# Altium PCB CTR-Controller-Rev-A.PcbDoc (part 2 of 2)
Units mil, origin at the board's own origin, x right, y up, seen from the top; angles counter-clockwise.
Board outline 3956.69 x 4568.8 mil, 2 copper layers (Top Layer, Bottom Layer), stack 61.2 mil thick; 177 components, 110 nets, 500 pads, 208 vias.
Unrouted connection lines stored in the file: 115.
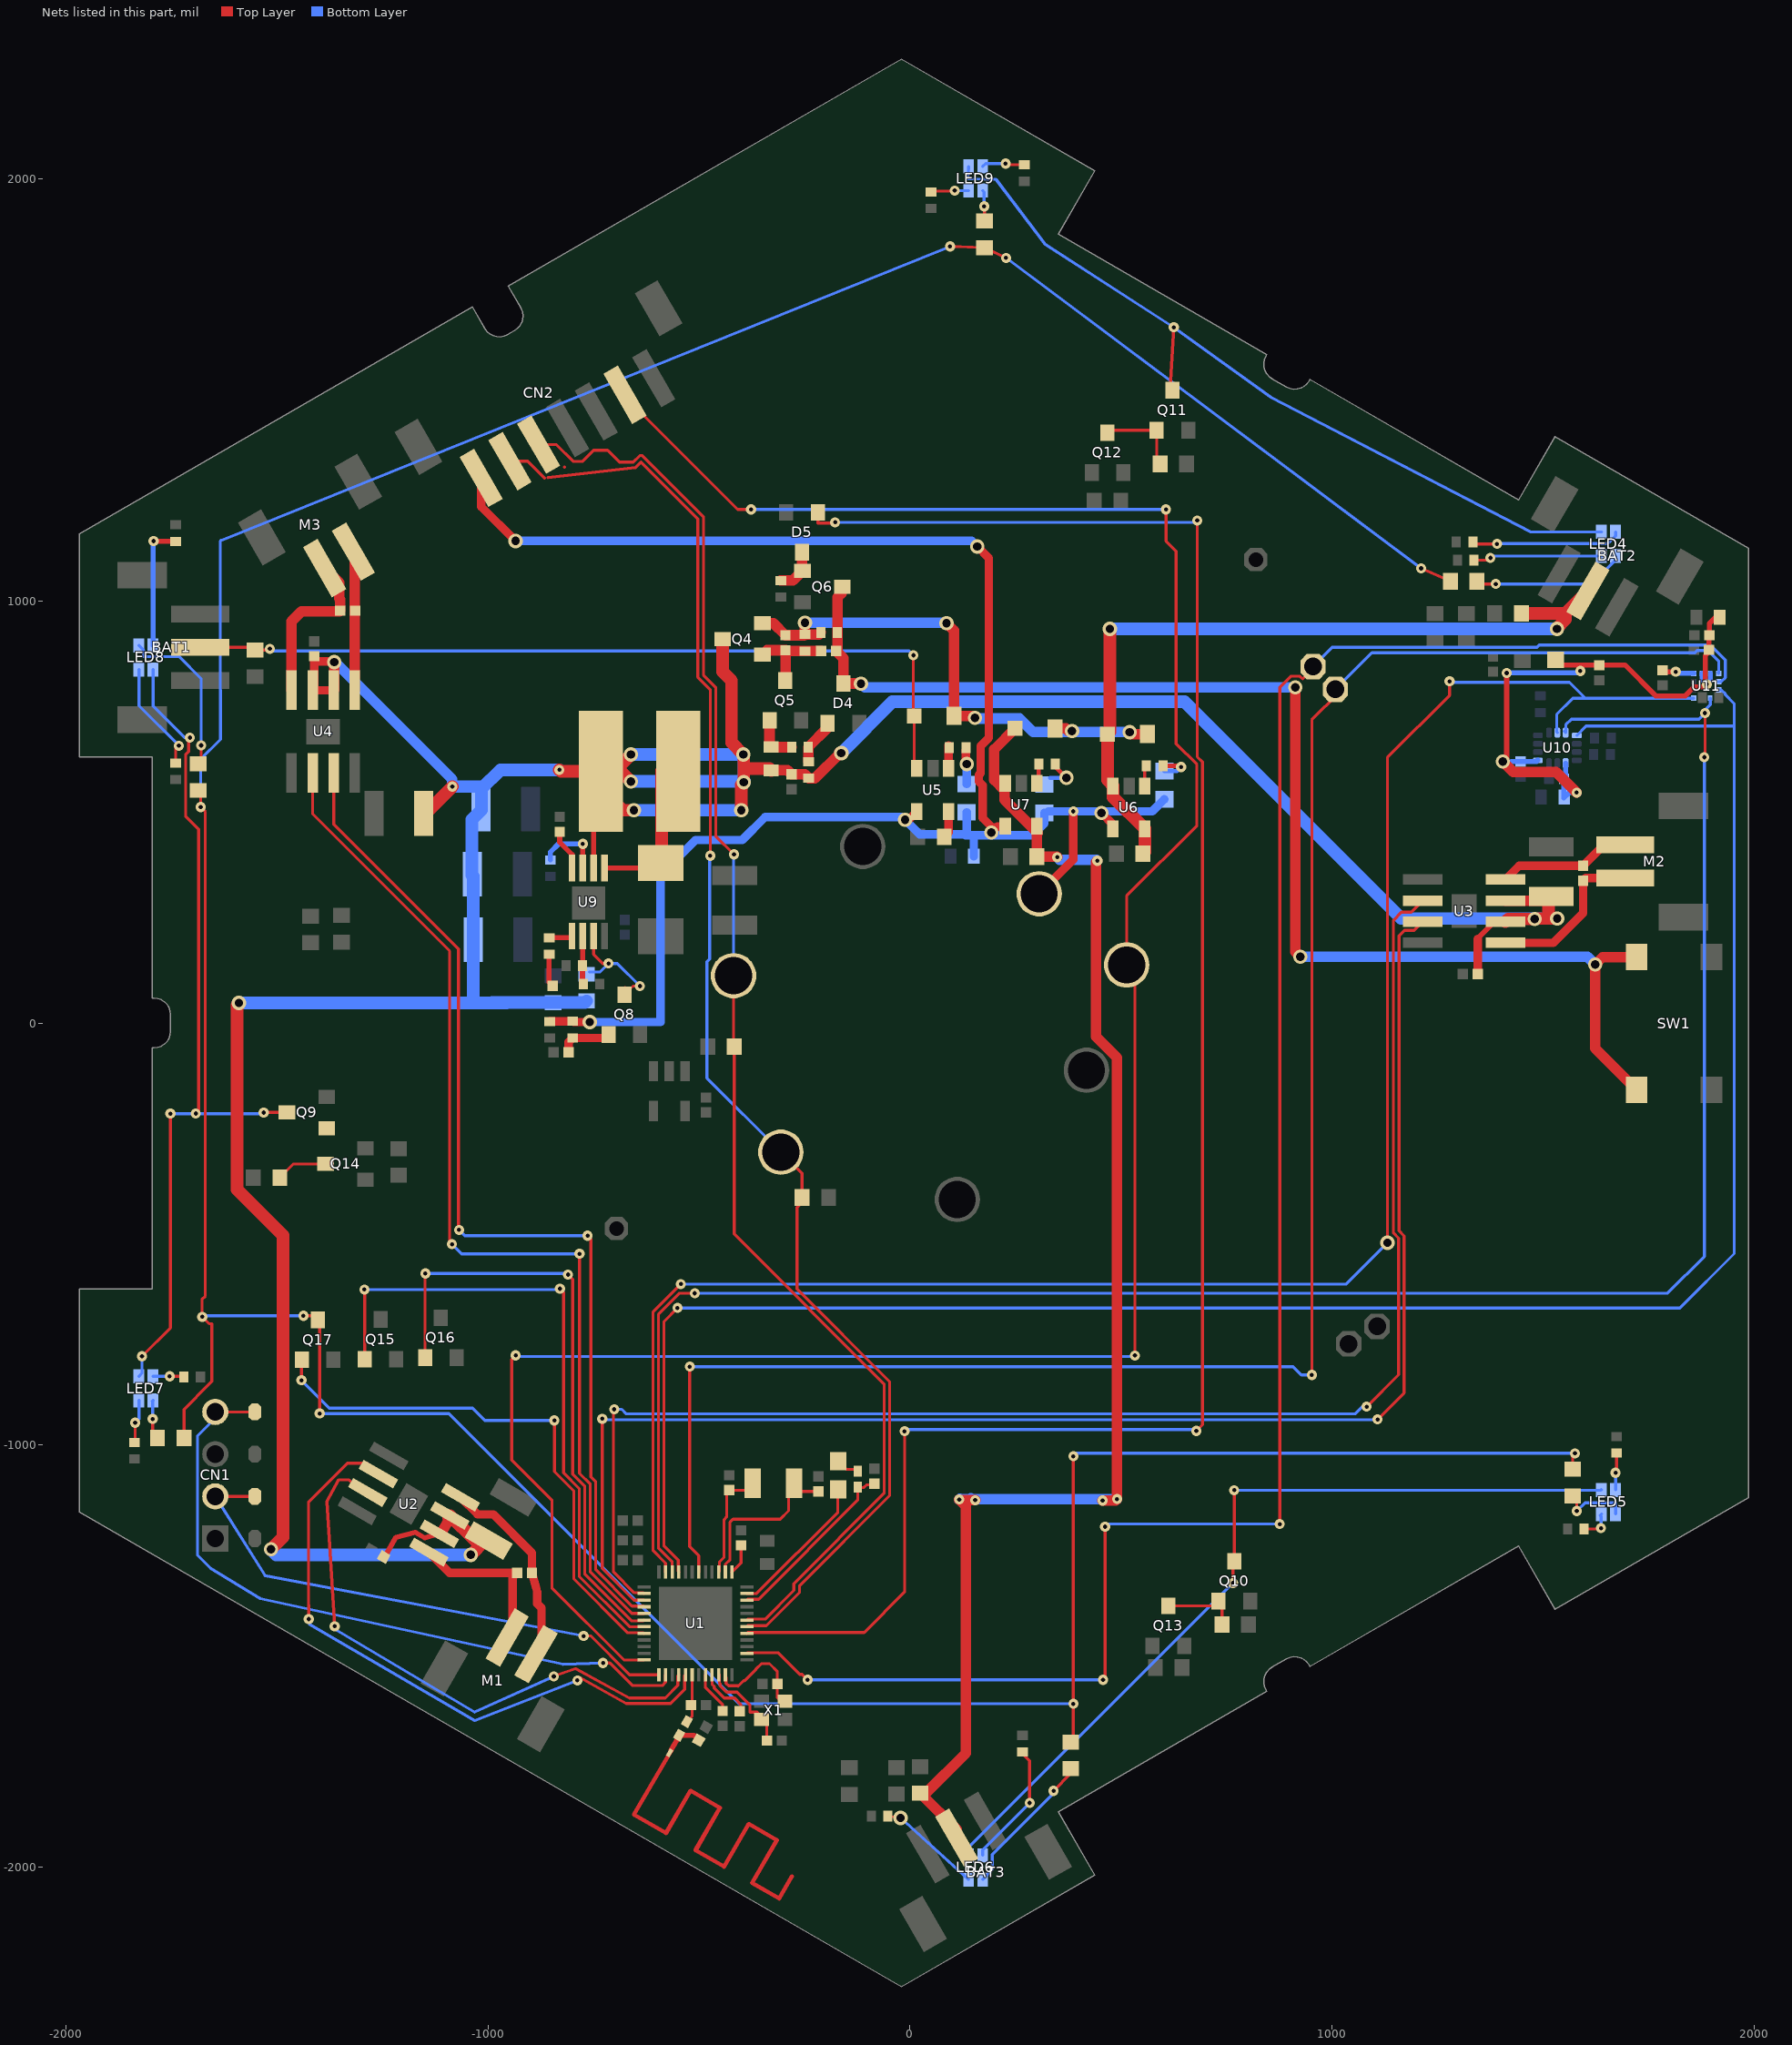
[diagram p2: the nets of this part, all layers, seen from the top]

## Via types
v1: diameter 24, hole 10, Top Layer to Bottom Layer, 168 vias
v2: diameter 34, hole 20, Top Layer to Bottom Layer, 35 vias
v3: diameter 24, hole 10, Top Layer to Bottom Layer, tented bottom, 5 vias

## Nets (pads, with @x,y where several pads share a name; then routed paths per layer and width w, separated by ;. In a path a pad name is that pad's centre, name@x,y a point inside that pad or via, vN(x,y) a via of type N, cw(c..) or ccw(c..) an arc to the next point about the centre after c; other vN are vias at no path point) (continued)
LED_PWM_BLUE: Q16.1 U1.18 | length 1452.7
  Top Layer w7: Q16.1@-1149.61,-793.31 -1149.61,-594.49 v1(-1148.82,-593.7) ; v1(-810.63,-596.46) -799.76,-607.33 -799.76,-1069.85 -770.95,-1098.67 -770.95,-1306.84 -660.68,-1417.1 -632.46,-1417.1 U1.18@-630.71,-1415.35
  Bottom Layer w7: v1(-1148.82,-593.7) -813.39,-593.7 v1(-810.63,-596.46)
LED_PWM_GREEN: Q15.1 U1.19 | length 1533.7
  Top Layer w7: v1(-1293.31,-631.89) -1292.52,-632.68 Q15.1@-1292.52,-797.24 ; v1(-829.92,-629.92) -821.41,-638.43 -821.41,-1066.58 -783.95,-1104.05 -783.95,-1312.22 -665.07,-1431.1 U1.19@-630.71,-1431.1
  Bottom Layer w7: v1(-1293.31,-631.89) -831.89,-631.89 v1(-829.92,-629.92)
LED_PWM_RED: Q17.1 U1.20 | length 1303.9
  Top Layer w7: v1(-1442.52,-846.85) -1442.52,-803.54 -1444.49,-801.57 Q17.1@-1441.34,-798.43 ; v1(-842.91,-942.13) -842.91,-1063.47 -796.95,-1109.44 -796.95,-1317.61 -669.05,-1445.5 -632.06,-1445.5 U1.20@-630.71,-1446.85
  Bottom Layer w7: v1(-1442.52,-846.85) -1376.55,-912.82 -1037.01,-912.82 -1007.7,-942.13 v1(-842.91,-942.13)
M1_PWMA: U1.29 U2.2 | length 1542.4
  Top Layer w7: v1(-1425.2,-1412.99) -1425.65,-1343.47 -1425.65,-1135.49 -1333.46,-1043.31 -1286.73,-1043.31 U2.2@-1260.36,-1069.68 ; v1(-788.58,-1558.27) -783.46,-1550.79 -672.66,-1613.02 -567.37,-1613.02 -534.03,-1579.68 -534.03,-1547.02 U1.29@-532.28,-1545.28
  Bottom Layer w7: v1(-1425.2,-1412.99) -1422.89,-1425.65 -1031.89,-1653.57 v1(-788.58,-1558.27)
M1_PWMB: U1.28 U2.3 | length 1387.9
  Top Layer w7: v1(-1363.78,-1429.92) -1382.28,-1134.65 -1354.84,-1083.07 -1329.53,-1083.07 -1299.61,-1112.99 U2.3@-1285.36,-1112.99 ; v1(-844.49,-1548.82) -843.31,-1547.64 -792.91,-1530.31 -665.55,-1600.02 -580.13,-1600.02 -550.34,-1570.23 -550.34,-1547.59 U1.28@-548.03,-1545.28
  Bottom Layer w7: v1@-1368.7,-1432.61 -1367.62,-1434.6 -1366.83,-1435.07 -1031.81,-1633.54 v1(-844.49,-1548.82)
M2_PWMA: U1.14 U3.2 | length 3552.8
  Top Layer w7: v1(-701.18,-915.75) -703.02,-917.59 -703.02,-1301.22 -653.63,-1350.61 -632.46,-1350.61 U1.14@-630.71,-1352.36 ; v1(1082.28,-909.45) 1157.95,-833.79 1157.95,-510.23 1145.89,-498.17 1145.89,243.4 1164.95,262.46 1187.89,262.46 U3.2@1215.39,289.96
  Bottom Layer w7: v1(-701.18,-915.75) -683.46,-915.75 -672.59,-926.63 1054.87,-926.63 1072.05,-909.45 v1(1082.28,-909.45)
M2_PWMB: U1.15 U3.3 | length 3571.3
  Top Layer w7: v1(-729.53,-938.19) -729.53,-1293.1 -654.52,-1368.11 U1.15@-630.71,-1368.11 ; v1(1108.27,-939.76) 1170.95,-877.09 1170.95,-504.85 1158.89,-492.79 1158.89,206.4 1172.18,219.69 1195.11,219.69 U3.3@1215.39,239.96
  Bottom Layer w7: v1(-729.53,-938.19) -727.32,-940.4 1107.63,-940.4 v1(1108.27,-939.76)
M3_PWMA: U1.17 U4.2 | length 2498.2
  Top Layer w7: U4.2@-1415.94,592.55 -1415.94,495.08 -1091.4,170.53 -1091.4,-518.84 v1(-1085.83,-524.41) ; v1(-783.46,-547.24) -783.46,-1067.76 -757.95,-1093.28 -757.95,-1301.45 -659.79,-1399.61 U1.17@-630.71,-1399.61
  Bottom Layer w7: v1(-1085.83,-524.41) -1062.99,-547.24 v1(-783.46,-547.24)
M3_PWMB: U1.16 U4.3 | length 2466.9
  Top Layer w7: U4.3@-1365.94,592.55 -1365.94,471.06 -1070.47,175.59 -1070.47,-488.98 v1(-1068.9,-490.55) ; v1(-764.17,-504.33) -756.69,-511.81 -756.69,-1076.15 -744.95,-1087.9 -744.95,-1296.07 -658.97,-1382.05 -640.29,-1382.05 -640.29,-1382.11 -632.46,-1382.11 U1.16@-630.71,-1383.86
  Bottom Layer w7: v1(-1068.9,-490.55) -1055.12,-504.33 v1(-764.17,-504.33)
MAG_DRDY: TP6.1 U1.38 U11.8 | length 4821
  Top Layer w7: U1.38@-386.61,-1494.09 -385.18,-1492.66 -312.83,-1492.66 -261.38,-1544.1 -255.9,-1544.1 v1(-242.91,-1557.09) ; v1(457.48,-1557.09) 462.2,-1552.36 v1(462.2,-1194.09) ; v1(876.38,-1187.8) 876.38,795.74 902.41,821.78 924.36,821.78 930.75,815.39 957.87,842.52 TP6.1@955.51,844.88
  Bottom Layer w7: v1(-242.91,-1557.09) v1(457.48,-1557.09) ; v1(462.2,-1194.09) 468.5,-1187.8 v1(876.38,-1187.8) ; TP6.1@955.12,844.88 1000.78,890.54 1485.7,890.54 1491.1,895.94 1896.78,895.94 1932.43,860.29 1932.43,818.41 1923.08,809.06 U11.8@1916.54,809.06
MAG_INT: TP7.1 U1.6 U11.7 | length 4620.8
  Top Layer w7: v1(-522.29,-814.72) -522.29,-1241.35 -500.85,-1262.78 -500.85,-1301.12 U1.6@-500.79,-1301.18 ; v1(952.36,-834.25) 952.36,718.5 1016.54,782.68 TP7.1@1008.27,790.94
  Bottom Layer w7: v1(-522.29,-814.72) 908.03,-814.72 927.56,-834.25 v1(952.36,-834.25) ; TP7.1@1008.27,790.94 1094.87,877.54 1860.33,877.54 1865.73,882.94 1891.39,882.94 1916.99,857.35 1916.99,832.34 1914.96,830.32 U11.7@1916.54,828.74
MISO: U1.9 U10.1 U11.9 | length 4948.9
  Top Layer w7: v1(-551.18,-675.59) -583.16,-707.57 -583.16,-1239.87 -549.65,-1273.38 -549.65,-1299.56 U1.9@-548.03,-1301.18
  Bottom Layer w7: v1(-551.18,-675.59) 1824.8,-675.59 1953.54,-546.85 1953.54,757.09 1932.43,778.2 1932.43,780.02 1923.08,789.37 U11.9@1916.54,789.37 ; U10.1@1580.32,681.5 1602.52,703.7 1951.73,703.7 1952.76,704.72
MOSI: U1.10 U10.14 U11.11 | length 4853.9
  Top Layer w7: U1.10@-563.78,-1301.18 -563.78,-1277.64 -596.16,-1245.26 -596.16,-690.17 -546.55,-640.55 v1(-510.24,-640.55) ; v1(1882.68,629.92) 1884.25,631.5 v1(1884.25,734.65)
  Bottom Layer w7: v1(-510.24,-640.55) 1795.67,-640.55 1882.68,-553.54 v1(1882.68,629.92) ; U10.14@1550.54,691.58 U10.14@1553.94,688.19 1554.33,688.58 1554.33,706.69 1567.72,720.08 1869.68,720.08 v1(1884.25,734.65) 1884.25,741.73 1896.85,754.33 U11.11@1896.85,769.68
NetC1_1: C1.1 L1.2 U1.46 | length 431.6
  Top Layer w7: U1.46@-386.61,-1368.11 -384.3,-1365.8 -358.78,-1365.8 -124.02,-1131.03 L1.2@-124.02,-1100.2 ; L1.2@-121.36,-1102.85 -119.49,-1100.98 -109.45,-1100.98 -103.35,-1094.88 C1.1@-84.65,-1094.88
NetC2_1: C2.1 U1.35 X1.3 | length 247.1
  Top Layer w7: U1.35@-437.8,-1545.28 -437.8,-1549.33 -435.98,-1551.14 -435.98,-1565.17 -430.13,-1571.02 -408.75,-1571.02 -407.56,-1572.21 -394.62,-1559.28 -392.26,-1559.28 -364.81,-1531.82 -364.81,-1531.25 -352.21,-1518.66 -333.09,-1518.66 -314.57,-1537.18 C2.1@-314.57,-1566.54 -314.57,-1599.61 X1.3@-307.87,-1606.3
NetC3_1: C3.1 U1.34 X1.1 | length 227.9
  Top Layer w7: U1.34@-453.54,-1545.28 -451.8,-1545.28 -451.8,-1556.97 -451.73,-1556.97 -451.73,-1565.17 -449.98,-1566.91 -449.98,-1570.96 -434.74,-1586.21 -410.24,-1586.21 -379.29,-1617.17 -379.29,-1633.62 -362.83,-1633.62 -351.57,-1644.88 X1.1@-351.57,-1651.18 -339.37,-1663.39 C3.1@-339.37,-1700.79
NetC5_1: C5.1 U1.1 | length 72
  Top Layer w7: U1.1@-422.05,-1301.18 -400.39,-1279.53 C5.1@-400.39,-1238.19
NetC6_1: C6.1 U1.33 | length 127.2
  Top Layer w7: U1.33@-469.29,-1545.28 -469.29,-1567.47 -465.8,-1570.97 -465.73,-1570.97 -463.98,-1572.71 -463.98,-1576.76 -440.54,-1600.21 -416.04,-1600.21 -401.18,-1615.07 C6.1@-401.18,-1629.92
NetC7_1: C7.1 U1.32 | length 102.4
  Top Layer w7: U1.32@-485.04,-1545.28 -485.04,-1575.51 -444.09,-1616.45 C7.1@-444.09,-1630.71
NetC8_2: C8.2 U1.2 X2.1 | length 402.8
  Top Layer w7: U1.2@-437.8,-1301.18 -437.8,-1283.1 -426.77,-1272.08 -426.77,-1183.07 -419.69,-1175.98 -307.48,-1175.98 -287.8,-1156.3 X2.1@-287.8,-1091.73 ; X2.1@-274.8,-1090.94 -255.51,-1110.24 C8.2@-217.32,-1110.24
NetC9_2: C9.2 U1.3 X2.2 | length 265.5
  Top Layer w7: U1.3@-453.54,-1301.18 -451.8,-1299.43 -451.8,-1277.3 -440.77,-1266.28 -440.77,-1177.27 -434.65,-1171.15 C9.2@-434.65,-1114.96 ; C9.2@-421.65,-1114.17 C9.2@-428.35,-1107.48 -389.76,-1107.48 X2.2@-373.23,-1090.94
NetC10_1: C10.1 L3.1 U1.30 | length 120.5
  Top Layer w7: L3.1@-528.84,-1655.85 -516.54,-1643.55 U1.30@-516.54,-1545.28 ; C10.1@-525.76,-1618.2 C10.1@-522.37,-1621.58
NetC11_1: C11.1 E1.1 L3.2 | length 81.3
  Top Layer w12: E1.1@-566.88,-1725.01 L3.2@-551.93,-1699.11 ; L3.2@-547.54,-1688.24 -512.73,-1688.24 C11.1@-500.98,-1699.99
NetC17_1: C17.1 M1.2 U2.5 | length 362.1
  Top Layer w20: U2.5@-1140.61,-1254.29 -1091.36,-1303.54 C17.1@-931.5,-1303.54 -941.81,-1313.86 M1.2@-941.81,-1431.89
NetC17_2: C17.2 M1.1 U2.8 | length 444.8
  Top Layer w20: U2.8@-1065.61,-1124.38 -1025.35,-1164.65 -987.97,-1164.65 -896.06,-1256.56 C17.2@-896.06,-1303.54 -886.62,-1338.19 -883.72,-1348.82 -883.72,-1376.17 -873.62,-1386.27 M1.1@-873.62,-1471.26
NetC20_1: C20.1 M2.2 U3.5 | length 392.1
  Top Layer w20: U3.5@1411.39,189.96 1524.61,189.96 1595.28,260.63 C20.1@1595.28,337.01 1601.57,343.31 M2.2@1695.28,343.31
NetC20_2: C20.2 M2.1 U3.8 | length 317.9
  Top Layer w20: U3.8@1411.39,339.96 1443.87,372.44 C20.2@1595.28,372.44 1644.88,422.05 M2.1@1695.28,422.05
NetC23_1: C23.1 M3.2 U4.5 | length 330.5
  Top Layer w25: M3.2@-1319.29,1117.32 -1316.14,1114.17 -1316.14,912.8 -1316.6,912.34 -1316.6,789.21 U4.5@-1315.94,788.55
NetC23_2: C23.2 M3.1 U4.8 | length 405.1
  Top Layer w25: U4.8@-1465.95,788.55 -1465.94,952.17 -1442.52,975.59 -1352.36,975.59 C23.2@-1350.79,977.17 -1350.79,1003.94 -1353.15,1006.3 -1353.15,1043.62 M3.1@-1387.48,1077.95
NetC28_2: C28.2 C32.2 Q4.1 Q5.3 R17.1 | length 216
  Top Layer w25: Q4.1@-349.61,872.83 -338.98,883.46 C28.2@-295.28,883.46 ; Q5.3@-295.67,811.81 -295.28,812.2 C28.2@-295.28,883.46 ; C32.2@-210.63,881.5 R17.1@-249.21,881.5 -293.31,881.5 C28.2@-295.28,883.46
NetC29_2: C29.2 Q5.1 R20.2 | length 113.6
  Top Layer w25: Q5.1@-333.07,717.32 -333.07,657.87 C29.2@-329.13,653.94 -328.74,653.54 R20.2@-280.71,653.54
NetC32_1: C32.1 D4.3 Q6.3 R16.1 SW1.3 SW1.4 | length 3096.1
  Top Layer w25: Q6.3@-162.6,1018.11 -172.05,1008.66 R16.1@-172.05,925.59 -172.05,884.65 C32.1@-175.2,881.5 -157.87,864.17 D4.3@-157.87,804.72 -116.93,804.72 v2(-116.54,804.33) ; v2(913.39,795.28) 913.39,168.5 v2(924.8,157.09) ; SW1.4@1722.44,-158.66 1624.02,-60.24 v2(1624.02,138.58) 1641.73,156.3 SW1.3@1722.44,156.3
  Bottom Layer w25: v2(-116.54,804.33) -107.48,795.28 v2(913.39,795.28) ; v2(924.8,157.09) 1605.51,157.09 v2(1624.02,138.58) v2@1622.44,138.58
NetC40_1: C40.1 U9.8 | length 97.9
  Top Layer w12: C40.1@-830.32,453.15 -830.32,428.35 -801.18,399.21 U9.8@-801.18,367.32
NetC41_1: C41.1 R26.2 | length 78
  Top Layer w12: R26.2@-855.51,162.6 -855.51,96.85 C41.1@-846.85,88.19
NetC42_1: C42.1 C43.1 C44.1 C45.1 C46.1 C47.1 C49.1 L5.1 U10.5 U10.8 U11.5 U11.6 | length 1453.4
  Top Layer w12: v2(1405.12,619.68) 1414.17,628.74 v1(1414.17,829.53) ; L5.1@1530.32,860.63 1542.52,848.43 1588.58,848.43 ; v1(1588.58,834.25) 1588.58,848.43 ; v1@1884.65,810.63 1884.65,870.04 1893.31,878.7 C49.1@1893.31,884.65 1893.31,917.72 C45.1@1894.49,918.9 1894.49,946.46 C46.1@1914.17,966.14 ; v1(1888.58,802.75) 1887.01,802.75 1881.1,796.85 1858.98,796.85 1837.13,775 1767.87,775 1694.45,848.43 1588.58,848.43
  Top Layer w25: v2(1405.12,619.68) 1429.92,594.88 1531.1,594.88 v1(1579.92,546.06)
  Bottom Layer w7: U10.8@1487.8,622.83 U10.8@1488.19,622.44
  Bottom Layer w12: v2(1405.12,619.68) 1415.35,609.45 1425.59,619.68 C43.1@1446.85,619.68 1484.65,619.68 U10.8@1487.8,622.83 ; v1(1414.17,829.53) 1583.86,829.53 v1(1588.58,834.25) ; C42.1@1550,578.35 1550,533.46 1562.6,546.06 v1(1579.92,546.06) ; C42.1@1553.94,577.95 U10.5@1553.94,615.75 ; U11.5@1877.17,828.74 1877.17,814.17 v1(1888.58,802.75) 1896.85,811.03 U11.6@1896.85,828.74
NetC50_1: C50.1 U11.4 | length 76.6
  Top Layer w12: C50.1@1783.86,835.83 1787.4,832.28 v1(1814.96,832.28)
  Bottom Layer w12: v1(1814.96,832.28) 1818.5,828.74 U11.4@1857.48,828.74
NetD4_1: D4.1 R18.1 R20.1 | length 109
  Top Layer w25: R18.1@-241.24,620.37 -241.34,620.47 R20.1@-241.34,653.54 -195.28,699.61 D4.1@-195.28,710.24
NetD5_3: D5.3 Q6.1 R21.2 | length 105.1
  Top Layer w25: R21.2@-306.3,1048.82 -277.95,1048.82 Q6.1@-255.12,1071.65 -255.91,1072.44 D5.3@-255.91,1115.75
NetD6_1: D6.1 L4.2 U9.5 | length 349
  Top Layer w12: U9.5@-724,367.32 D6.1@-616.14,367.32
  Top Layer w20: D6.1@-616.14,367.32 D6.1@-607.09,376.38
  Top Layer w30: D6.1@-607.09,376.38 -588.98,394.49 L4.2@-588.98,597.24
NetL1_1: L1.1 L2.2 | length 59.8
  Top Layer w7: L2.2@-170.08,-1038.58 -150.79,-1057.87 L1.1@-118.31,-1057.87
NetL2_1: L2.1 U1.47 | length 327.8
  Top Layer w7: U1.47@-386.61,-1352.36 -363.73,-1352.36 -171.26,-1159.89 -171.26,-1127.17
NetLED1_2: LED1.2 R2.2 | length 81.5
  Top Layer w20: R2.2@132.28,646.85 132.28,615.75 v2(134.25,613.78)
  Bottom Layer w20: LED1.2@134.25,566.14 v2(134.25,613.78)
NetLED2_2: LED2.2 R6.2 | length 87.7
  Top Layer w10: R6.2@599.61,609.45 639.76,609.45 v1(642.52,606.69)
  Bottom Layer w10: LED2.2@602.76,597.24 633.07,597.24 v1(642.52,606.69)
NetLED3_2: LED3.2 R12.2 | length 81.6
  Top Layer w10: R12.2@344.49,613.39 344.49,607.09 v2(370.47,581.1)
  Bottom Layer w10: LED3.2@331.89,581.1 v2(370.47,581.1)
NetLED4_1: LED4.1 R47.2 | length 364.2
  Top Layer w7: R47.2@1343.7,1046.85 1350,1040.55 v1(1388.19,1040.55)
  Bottom Layer w7: v1(1388.19,1040.55) 1615.62,1040.55 1672.35,1097.28 LED4.1@1672.35,1106.78
NetLED4_2: LED4.2 R44.2 | length 357.4
  Top Layer w7: R44.2@1334.25,1140.16 1338.98,1135.43 v1(1391.34,1135.43)
  Bottom Layer w7: v1(1391.34,1135.43) 1392.13,1136.22 1654.2,1136.22 1672.35,1154.37 LED4.2@1672.35,1163.87
NetLED4_3: LED4.3 R41.2 | length 306.4
  Top Layer w7: R41.2@1336.61,1096.85 1370.08,1096.85 v1(1375.59,1102.36)
  Bottom Layer w7: v1(1375.59,1102.36) 1380.01,1106.78 LED4.3@1638.88,1106.78
NetLED4_4: LED4.4 LED9.4 Q11.3 | length 1948.1
  Top Layer w7: Q11.3@622.05,1499.61 616.54,1505.12 v1(625.2,1648.82)
  Bottom Layer w7: LED9.4@138.68,2030.01 137.4,2000.79 203.94,1999.21 320.39,1845.53 v1(625.2,1648.82) 855.12,1483.07 1471.26,1163.87 LED4.4@1638.88,1163.87
NetLED5_1: LED5.1 R46.2 | length 166.8
  Top Layer w7: R46.2@1570.47,-1120.87 1580.32,-1130.71 v1(1580.32,-1156.69)
  Bottom Layer w7: v1(1580.32,-1156.69) 1599.87,-1137.13 1672.35,-1137.13 LED5.1@1672.35,-1163.87
NetLED5_2: LED5.2 R43.2 | length 88.1
  Top Layer w7: v1(1672.35,-1066.24) 1674.8,-1063.78 R43.2@1674.8,-1019.69
  Bottom Layer w7: LED5.2@1672.35,-1106.78 v1(1672.35,-1066.24)
NetLED5_3: LED5.3 R40.2 | length 76.8
  Top Layer w7: R40.2@1598.03,-1199.61 1635.83,-1199.61 v1(1637.8,-1197.64)
  Bottom Layer w7: v1(1637.8,-1197.64) 1637.8,-1169.68 1635.43,-1167.31 LED5.3@1638.88,-1163.87
NetLED5_4: LED5.4 LED6.4 Q10.3 | length 1997.4
  Top Layer w7: v1(765.35,-1327.56) 765.35,-1279.13 Q10.3@768.5,-1275.98 v1(768.5,-1107.48)
  Bottom Layer w7: LED6.4@138.68,-1972.92 138.68,-1954.23 v1(765.35,-1327.56) ; v1(768.5,-1107.48) 1637.22,-1107.48 1638.4,-1106.3 LED5.4@1638.88,-1106.78
NetLED6_1: LED6.1 R55.2 | length 348.7
  Top Layer w7: v1(340.08,-1820.16) 380.71,-1779.53 R55.2@380.71,-1767.72
  Bottom Layer w7: LED6.1@172.14,-2030.01 194.94,-2007.21 194.94,-1971.04 340.08,-1825.9 v1(340.08,-1820.16)
NetLED6_2: LED6.2 R52.2 | length 299.9
  Top Layer w7: R52.2@266.93,-1727.95 264.57,-1730.32 283.46,-1749.21 v1(283.46,-1848.82)
  Bottom Layer w7: LED6.2@172.14,-1972.92 172.14,-1960.14 v1(283.46,-1848.82)
NetLED6_3: LED6.3 R49.2 | length 247.5
  Top Layer w7: R49.2@-52.36,-1879.92 v2(-22.44,-1884.25)
  Bottom Layer w7: v2(-22.44,-1884.25) LED6.3@138.68,-2030.01
NetLED7_1: LED7.1 R54.2 | length 92.5
  Top Layer w7: R54.2@-1796.06,-985.83 -1795.28,-985.04 v1(-1795.28,-938.58)
  Bottom Layer w7: v1(-1795.28,-938.58) -1795.28,-897.24 -1796.06,-896.46 LED7.1@-1794.29,-894.69
NetLED7_2: LED7.2 R51.2 | length 73.8
  Top Layer w7: v1(-1754.92,-837.6) -1723.03,-837.6 R51.2@-1721.26,-839.37
  Bottom Layer w7: LED7.2@-1794.29,-837.6 v1(-1754.92,-837.6)
NetLED7_3: LED7.3 R48.2 | length 103.7
  Top Layer w7: R48.2@-1838.19,-994.09 -1836.61,-992.52 v1(-1836.61,-947.64)
  Bottom Layer w7: v1(-1836.61,-947.64) -1827.76,-938.78 LED7.3@-1827.76,-894.69
NetLED7_4: LED7.4 LED8.4 Q9.3 | length 2035.1
  Top Layer w7: v1(-1820.47,-790.16) -1753.15,-722.83 v1(-1753.15,-214.96) ; v1@-1710.07,666.61 -1710.07,643.05 -1717.09,636.03 -1717.09,489.92 -1686.22,459.06 -1686.22,-207.87 v1(-1692.91,-214.57) ; v1(-1531.89,-212.6) -1531.5,-212.2 Q9.3@-1477.17,-212.2
  Bottom Layer w7: LED7.4@-1827.76,-837.6 -1820.47,-830.31 v1(-1820.47,-790.16) ; LED8.4@-1794.29,837.6 -1794.29,750.83 -1719.83,676.38 v1(-1707.08,676.38) ; v1(-1753.15,-214.96) -1534.25,-214.96 v1(-1531.89,-212.6)
NetLED8_1: LED8.1 R45.2 | length 393.7
  Top Layer w7: R45.2@-1687.4,614.17 -1680.32,621.26 v1(-1680.32,657.87)
  Bottom Layer w7: LED8.1@-1827.76,894.69 -1816.59,883.52 -1816.59,868.45 -1777.56,868.45 -1777.51,868.5 -1732.68,868.5 -1680.32,816.14 v1(-1680.32,657.87)
NetLED8_2: LED8.2 R42.2 | length 266.9
  Top Layer w7: R42.2@-1740.94,616.14 -1740.94,654.33 -1738.19,657.09 v1(-1733.07,657.09)
  Bottom Layer w7: LED8.2@-1827.76,837.6 -1827.76,751.77 v1(-1733.07,657.09)
NetLED8_3: LED8.3 R39.2 | length 300.3
  Top Layer w12: v1(-1792.91,1142.13) -1741.73,1142.13 R39.2@-1740.94,1141.34
  Bottom Layer w12: LED8.3@-1794.29,894.69 -1794.29,1140.75 v1(-1792.91,1142.13)
NetLED9_1: LED9.1 R56.2 | length 73.9
  Top Layer w7: v1(175.59,1935.43) 176.38,1934.65 R56.2@176.38,1900.79
  Bottom Layer w7: LED9.1@172.14,1972.92 175.59,1969.47 v1(175.59,1935.43)
NetLED9_2: LED9.2 R53.2 | length 103.2
  Top Layer w7: v1(226.38,2037.01) 229.13,2034.25 R53.2@271.26,2034.25
  Bottom Layer w7: LED9.2@172.14,2030.01 179.14,2037.01 v1(226.38,2037.01)
NetLED9_3: LED9.3 R50.2 | length 90
  Top Layer w7: R50.2@50,1969.69 51.97,1971.65 104.72,1971.65 v1(105.99,1972.92)
  Bottom Layer w7: v1(105.99,1972.92) LED9.3@138.68,1972.92
NetQ8_3: Q8.3 R24.1 U9.3 | length 285.2
  Top Layer w7: U9.3@-750,205.91 -750,162.6 -728.35,140.94 v1(-714.57,140.94) ; Q8.3@-677.17,66.93 -656.69,87.4 v1(-640.16,87.4) ; Q8.3@-675.44,84.11 Q8.3@-674.41,83.07
  Bottom Layer w7: R24.1@-760.24,120.87 -734.65,120.87 v1(-714.57,140.94) -693.7,140.94 v1(-640.16,87.4)
NetQ9_1: Q9.1 Q14.3 R33.1 | length 121.6
  Top Layer w7: R33.1@-1493.7,-366.54 -1461.42,-334.25 Q14.3@-1385.43,-334.25
NetQ10_1: Q10.1 Q13.3 R34.1 | length 182.6
  Top Layer w7: Q13.3@612.2,-1381.89 719.69,-1381.89 Q10.1@731.1,-1370.47 739.37,-1378.74 R34.1@739.37,-1425.98
NetQ11_1: Q11.1 Q12.3 R35.1 | length 202.7
  Top Layer w7: Q12.3@468.11,1398.82 474.41,1405.12 Q11.1@584.65,1405.12 584.65,1332.68 R35.1@592.52,1324.8
NetR1_2: R1.2 U5.5 | length 64
  Top Layer w20: R1.2@81.1,441.34 91.14,451.38 U5.5@91.14,501.18
NetR2_1: R2.1 U5.1 | length 54.8
  Top Layer w20: U5.1@91.14,603.18 91.14,657.68 R2.1@91.34,657.87
NetR6_1: R6.1 U6.1 | length 49.3
  Top Layer w7: U6.1@556.1,561.84 556.1,605.32 R6.1@560.24,609.45
NetR12_1: R12.1 U7.1 | length 47.1
  Top Layer w10: U7.1@300.59,568.14 305.12,572.67 R12.1@305.12,613.39
NetR25_1: R25.1 R27.2 U9.2 | length 114.9
  Top Layer w12: U9.2@-775.59,205.91 -775.59,136.61 R27.2@-776.38,135.83 -776.38,94.09 R25.1@-774.41,92.13
NetR26_1: R26.1 U9.1 | length 56
  Top Layer w12: R26.1@-855.51,201.97 -805.12,201.97 U9.1@-801.18,205.91
NetR28_1: R28.1 U9.7 | length 160.7
  Top Layer w12: U9.7@-775.59,367.32 v1(-775.59,424.41)
  Bottom Layer w12: R28.1@-852.36,386.22 -852.36,405.12 -833.07,424.41 v1(-775.59,424.41)
POWER_OFF: D5.1 U1.41 | length 4586.7
  Top Layer w7: U1.41@-386.61,-1446.85 -384.3,-1444.54 -108.71,-1444.54 -12.99,-1348.82 v1(-12.99,-967.72) ; D5.1@-218.5,1210.24 -218.5,1184.65 -179.53,1184.65 v1(-177.56,1186.61) ; v1(678.74,-966.93) 693.26,-952.41 693.26,618.35 680.71,630.9 v1(680.71,1190.94)
  Bottom Layer w7: v1(-177.56,1186.61) 676.38,1186.61 v1(680.71,1190.94) ; v1(-12.99,-967.72) -8.82,-963.54 675.35,-963.54 v1(678.74,-966.93)
RED_DRAIN: Q17.3 R45.1 R46.1 R47.1 R54.1 R55.1 R56.1 | length 10034.2
  Top Layer w7: R54.1@-1720.87,-983.46 -1720.87,-916.11 -1661.06,-856.31 -1661.06,-855.94 -1654.72,-849.61 -1654.72,-712.99 -1661.02,-712.99 v1(-1677.56,-696.46) -1678.41,-695.61 -1678.41,-655.25 -1670.41,-647.25 -1670.41,500.73 v1(-1681.5,511.81) -1681.5,545.28 R45.1@-1687.4,551.18 ; v1(-1437.8,-694.09) -1413.78,-694.09 Q17.3@-1403.94,-703.94 -1399.21,-708.66 v1(-1399.21,-925.82) ; v1(94.88,1840.55) R56.1@176.38,1837.8 v1(227.56,1813.39) ; R55.1@380.71,-1704.72 375.59,-1699.61 387.01,-1688.19 v1(387.01,-1613.78) v1(387.01,-1027.17) ; v1(1211.42,1077.56) R47.1@1280.71,1046.85 ; R46.1@1570.47,-1057.87 1570.47,-1025.59 v1(1575.98,-1020.08)
  Bottom Layer w7: v1(-1681.5,511.81) -1681.5,624.87 -1634.41,671.96 -1634.41,788.78 -1634.77,789.15 -1634.77,1142.39 -1633.41,1143.76 v1(94.88,1840.55) ; v1(-1677.56,-696.46) -1675.2,-694.09 v1(-1437.8,-694.09) ; v1(-1399.21,-925.82) -1093.24,-925.82 -405.28,-1613.78 v1(387.01,-1613.78) ; v1(227.56,1813.39) v1(1211.42,1077.56) ; v1(387.01,-1027.17) 394.09,-1020.08 v1(1575.98,-1020.08)
RESET: CN2.6 RESET.1 U1.24 | length 5863.8
  Top Layer w7: v1(-934.65,-787.8) -944.09,-797.24 -944.09,-1035.83 -848.95,-1130.98 -848.95,-1339.15 -678.25,-1509.84 U1.24@-630.71,-1509.84 ; CN2.6@-675.51,1488.98 -675.51,1484.17 -408.66,1217.32 v1(-376.77,1217.32) ; v1(533.07,-788.19) 533.07,117.88 RESET.1@513.39,137.56 513.39,301.18 679.76,467.55 679.76,612.76 630.54,661.97 630.54,1118.28 606.69,1142.13 v1(606.69,1217.32)
  Bottom Layer w7: v1(-934.65,-787.8) -932.04,-790.4 530.86,-790.4 v1(533.07,-788.19) ; v1(-376.77,1217.32) -376.65,1217.2 606.57,1217.2 v1(606.69,1217.32)
SPI_CLK: U1.11 U10.13 U11.1 | length 4549.6
  Top Layer w7: U1.11@-579.53,-1301.18 -579.53,-1280.27 -609.16,-1250.64 -609.16,-684.78 v1(-543.28,-618.9) ; v2(1131.45,-521.21) 1131.45,629.08 1278.74,776.38 v1(1278.74,809.84)
  Bottom Layer w7: v1(-543.28,-618.9) 1033.76,-618.9 v2(1131.45,-521.21) ; v1@1280.32,807.48 1562.99,807.48 1600.79,769.68 ; U10.13@1534.25,688.19 1532.83,689.61 1532.83,731.5 1571.02,769.68 1600.79,769.68 ; U11.1@1857.48,769.68 1600.79,769.68
SWDCLK: CN1.2 TP3.1 U1.25 | length 1301.5
  Top Layer w7: CN1.2@-1646.85,-1122.05 TP3.1@-1553.15,-1122.05 ; v1(-773.62,-1453.15) -757.09,-1452.75 -664.57,-1545.28 U1.25@-595.28,-1545.28 U1.25@-595.76,-1544.79
  Bottom Layer w7: CN1.2@-1646.85,-1122.05 -1528.85,-1309.81 v1(-773.62,-1453.15)
SWDIO: CN1.4 TP1.1 U1.26 | length 1661.8
  Top Layer w7: CN1.4@-1646.85,-922.05 TP1.1@-1553.15,-922.05 ; v1(-727.56,-1516.93) -711.81,-1516.93 -711.55,-1516.67 -657.7,-1570.52 -587.4,-1570.52 -579.53,-1562.65 U1.26@-579.53,-1545.28
  Bottom Layer w7: CN1.4@-1630.32,-920.08 -1688.98,-978.74 -1688.98,-1261.81 -1658.72,-1292.07 -1540.49,-1364.11 -822.83,-1520.08 v1(-727.56,-1516.93)
UART_RX: CN2.2 R7.2 U1.42 UART_RX.1 | length 3530.3
  Top Layer w7: CN2.2@-948.27,1331.5 -906.26,1331.5 -866.62,1291.86 ; -858.55,1292.77 -650.69,1316.4 -637.56,1329.53 -502.77,1194.74 -502.77,819.55 -473.62,790.4 v1(-473.62,396.46) ; -819.09,1317.11 -819.09,1317.45 -818.31,1318.23 ; U1.42@-386.61,-1431.1 -384.3,-1428.79 -340.63,-1428.79 -262.2,-1350.36 -262.2,-1334.36 -48.42,-1120.57 -48.42,-850.13 -267.72,-630.83 -267.72,-437.04 -244.46,-413.78 R7.2@-255.91,-413.78 -255.91,-356.55 UART_RX.1@-306.23,-306.23
  Bottom Layer w7: v1(-473.62,396.46) -475.2,394.88 -475.2,151.33 -481.69,144.83 -481.69,-130.76 UART_RX.1@-306.23,-306.23
UART_TX: CN2.3 R5.2 U1.43 UART_TX.1 | length 3448.4
  Top Layer w7: CN2.3@-880.08,1370.87 -838.07,1370.87 -798.43,1331.23 -776.15,1331.23 -750.9,1356.48 -750.9,1356.82 -750.12,1357.6 -717,1357.6 -688.8,1329.4 -656.08,1329.4 -640.56,1344.92 -634.57,1344.92 -489.77,1200.13 -489.77,824.93 -460.62,795.78 -460.62,442.91 v1(-417.32,399.61) ; UART_TX.1@-418.31,112.09 -418.31,-54.13 R5.2@-416.54,-55.91 -416.54,-500.39 -61.42,-855.51 -61.42,-1115.18 -275.2,-1328.97 -275.2,-1344.98 -343.27,-1413.04 -384.3,-1413.04 U1.43@-386.61,-1415.35
  Bottom Layer w7: UART_TX.1@-418.31,112.09 -418.31,398.62 v1(-417.32,399.61)
VBAT: C28.1 D1.1 D2.1 D3.1 Q4.2 R16.2 R17.2 | length 1264.6
  Top Layer w25: Q4.2@-349.61,947.64 -324.02,947.64 C28.1@-295.28,918.9 -251.18,918.9 R17.2@-249.21,920.87 ; v2(-249.21,948.82) R17.2@-249.21,920.87 ; R16.2@-211.42,925.59 -216.14,920.87 R17.2@-249.21,920.87 ; v2(86.61,947.64) 104.33,929.92 D1.1@104.33,727.95 149.21,727.95 v2(153.94,723.23) ; D3.1@343.7,698.03 369.68,698.03 375.59,692.13 v2(383.86,692.13) ; v2(520.47,689.37) 525.2,684.65 D2.1@562.6,684.65
  Bottom Layer w25: v2(-249.21,948.82) 85.43,948.82 v2(86.61,947.64) ; v2(153.94,723.23) 155.51,721.65 259.84,721.65 292.13,689.37 v2(520.47,689.37) ; v2(383.86,692.13) v2@385.04,690.94
VBAT1: BAT1.2 D1.2 R11.2 U5.3 | length 1972.3
  Top Layer w7: BAT1.2@-1682.28,890.16 -1558.66,890.16 R11.2@-1552.36,883.86 -1520.47,883.86 v1(-1517.32,887.01) ; v1(7.87,871.65) 7.87,729.92 D1.2@9.84,727.95 9.84,609.48 U5.3@16.14,603.18
  Bottom Layer w7: v1(-1517.32,887.01) -1512.33,882.01 -2.48,882.01 v1(7.87,871.65)
VBAT2: BAT2.2 D2.2 R4.2 R9.2 U6.3 U6.5 | length 1858.8
  Top Layer w30: v2(473.62,934.25) 473.62,690.16 D2.2@468.11,684.65 468.11,575.43 481.3,562.24 481.3,535.24 556.3,460.24 556.3,405.51 R4.2@551.97,401.18 ; R9.2@1448.82,970.87 1553.46,970.87 ; v2(1533.46,934.25) 1533.46,936.22 1553.46,956.22 1553.46,970.87 ; BAT2.2@1607.01,1024.41 1553.46,970.87
  Bottom Layer w30: v2(473.62,934.25) v2(1533.46,934.25)
VBAT3: BAT3.2 D3.2 R8.2 R10.2 U7.3 U7.5 | length 3401.6
  Top Layer w25: BAT3.2@110.35,-1930.86 110.35,-1911.92 R10.2@24.02,-1825.59 37.4,-1825.59 132.68,-1730.31 132.68,-1145.67 v1@119.29,-1132.28 ; v1(116.54,-1129.53) v1@119.29,-1132.28 ; v1(154.33,-1131.1) 120.47,-1131.1 v1@119.29,-1132.28 ; D3.2@249.21,698.03 199.59,648.41 199.59,576 223.62,551.97 223.62,529.3 302.95,449.97 300.79,447.8 R8.2@300.79,394.09 347.64,394.09 v1(348.82,392.91) ; v1(444.09,384.65) 441.01,381.56 441.01,-32.42 490.69,-82.11 v1(490.69,-1128.6) 487.4,-1131.89 v1(456.3,-1131.89)
  Bottom Layer w25: v1(116.54,-1129.53) 117.91,-1128.16 118.35,-1128.6 141.87,-1128.6 ; v1@144.09,-1126.38 141.87,-1128.6 ; v1(154.33,-1131.1) 144.38,-1131.1 141.87,-1128.6 ; v1@354.72,387.01 441.73,387.01 v1(444.09,384.65) ; v1(490.69,-1128.6) 141.87,-1128.6
VCHG_OFF: C33.1 Q8.1 R22.1 | length 122.5
  Top Layer w20: C33.1@-809.45,-69.29 -809.45,-45.28 R22.1@-799.61,-35.43 -726.77,-35.43 Q8.1@-718.5,-27.17
VIN_5V: C24.1 CN2.1 LED1.1 LED2.1 LED3.1 R22.2 R23.2 U5.4 U6.4 U7.4 VIN.1 | length 4383.9
  Top Layer w20: CN2.1@-1016.46,1292.13 -1016.46,1223.95 v2(-935.04,1142.52) ; R23.2@-853.94,3.54 -853.54,3.94 R22.2@-799.61,3.94 -797.64,1.97 v2(-759.06,1.97) ; v2(-11.81,481.5) -11.02,480.71 -4.33,480.71 U5.4@16.14,501.18 ; v2(159.06,1129.53) 186.94,1101.65 186.94,676.06 167.25,656.38 167.25,592.24 162.84,587.82 162.84,572.45 172.05,563.24 172.05,485.83 192.52,465.35 v2@192.52,457.09 ; U7.4@225.59,466.14 207.09,466.14 v2@195.28,454.33 ; VIN.1@306.23,306.23 387.01,387.01 v1(387.01,501.57) ; v2(453.54,498.03) 481.1,470.47 U6.4@481.1,459.84 ; v2@192.52,457.09 v2@195.28,454.33 ; v2@192.52,457.09 v2(192.52,451.57) v2@195.28,454.33
  Bottom Layer w20: v2(-935.04,1142.52) 146.06,1142.52 v2(159.06,1129.53) ; v2(-759.06,1.97) -591.34,1.97 -591.34,350.39 -508.27,433.46 -398.03,433.46 -343.3,488.19 -18.51,488.19 v2(-11.81,481.5) ; v2@-15.35,477.95 v2(-11.81,481.5) ; LED1.1@134.25,499.21 134.25,451.9 129.17,446.81 ; C24.1@151.18,394.88 151.18,441.34 147.64,444.88 ; LED3.1@318.5,498.03 318.5,473.23 290.16,444.88 147.64,444.88 ; LED3.1@327.95,501.57 v1(387.01,501.57) 574.02,501.57 LED2.1@602.76,530.32 ; v2(-11.81,481.5) 22.87,446.81 129.17,446.81 ; 129.17,446.81 131.1,444.88 147.64,444.88
VSW: C15.2 C16.1 C18.2 C19.1 C21.2 C22.1 C29.1 C30.1 C34.1 C35.1 C36.1 C37.1 L4.1 Q4.3 R18.2 R24.2 U2.6 U2.7 U3.6 U3.7 U4.6 U4.7 U9.6 | length 9236.5
  Top Layer w12: C15.2@-1246.02,-1266.85 -1218.5,-1219.18 -1173.37,-1207.08 -1150.45,-1220.32 U2.6@-1115.61,-1210.99 -1093.57,-1172.8 U2.7@-1090.61,-1167.68 U2.7@-1089.53,-1171.72 ; U9.6@-750,367.32 -750,579.13 L4.1@-732.68,596.46 ; 1345.67,199.21 1345.67,200.71 1384.92,239.96 U3.6@1411.39,239.96
  Top Layer w20: C21.2@-1412.2,869.29 -1412.2,856.69 ; U4.6@-1365.94,788.55 U4.7@-1415.94,788.55 -1412.2,792.29 -1412.2,856.69 ; v2(-1364.56,855.51) -1365.75,856.69 -1412.2,856.69 ; C18.2@1345.67,116.14 1345.67,199.21
  Top Layer w25: U4.6@-1365.94,788.55 -1364.56,789.93 v2(-1364.56,855.51) ; U2.6@-1115.61,-1210.99 -1111.58,-1209.9 U2.7@-1089.53,-1171.72 ; L4.1@-732.68,596.46 L4.1@-732.68,687.8 ; C29.1@-329.13,598.82 -290.55,598.82 C30.1@-281.1,589.37 -249.61,589.37 R18.2@-240.16,579.92 -225.59,579.92 v2@-165.75,639.76 ; U3.7@1411.39,289.96 1510.04,289.96 C19.1@1519.68,299.61
  Top Layer w30: v2(-1590.55,47.24) -1595.41,42.39 -1595.41,-394.92 -1486.29,-504.04 -1486.29,-1218.97 v2(-1514.96,-1247.64) ; C22.1@-1148.82,496.46 v1(-1085.04,560.24) ; U2.7@-1093.57,-1172.8 -1089.53,-1171.72 U2.7@-1088.67,-1174.94 ; U2.7@-1090.61,-1167.68 -1031.47,-1226.83 C16.1@-1006.75,-1226.83 ; v2(-1041.34,-1260.63) -1040.94,-1261.02 C16.1@-1006.75,-1226.83 ; C16.1@-998.8,-1226.83 C16.1@-1006.75,-1226.83 ; v1(-831.1,600) -827.56,596.46 L4.1@-732.68,596.46 L4.1@-701.18,596.46 ; L4.1@-687.01,509.84 -681.5,504.33 v2(-654.33,504.33) ; v2(-661.81,572.44) -685.83,596.46 L4.1@-701.18,596.46 ; v2(-661.42,636.22) L4.1@-701.18,596.46 ; Q4.3@-444.09,910.24 -444.09,832.29 -423.12,811.31 -423.12,664.07 v2(-395.28,636.22) -394.09,635.04 -394.09,602.76 ; v2(-400,504.33) -400,564.57 v2(-394.09,570.47) -394.09,602.76 ; C29.1@-329.13,598.82 -333.07,602.76 -394.09,602.76 ; v2@-165.75,639.76 v2(-162.99,639.76) ; U3.6@1411.39,239.96 1417.88,246.46 v2(1480.71,246.46) 1481.89,247.64 1513.78,247.64 ; C19.1@1510.04,289.96 1513.78,286.22 1513.78,247.64 ; v2(1533.86,247.64) 1513.78,247.64
  Bottom Layer w20: v2(-1364.56,855.51) v2@-1363.78,856.29
  Bottom Layer w25: v2@-1363.78,856.29 -1085.04,577.55 v1(-1085.04,560.24)
  Bottom Layer w30: v2(-1590.55,47.24) -1034.25,47.24 ; v2(-1514.96,-1247.64) -1501.97,-1260.63 v2(-1041.34,-1260.63) ; v1(-1085.04,560.24) -1020.87,560.24 C36.1@-1015.75,555.12 ; -990.55,48.43 -955.51,48.43 ; v1(-831.1,600) -970.87,600 C36.1@-1015.75,555.12 ; R24.2@-766.54,52.36 -770.47,48.43 C37.1@-846.06,48.43 -955.51,48.43 ; v2(-661.81,572.44) v2@-394.09,572.44 ; v2(-661.42,636.22) v2(-395.28,636.22) -394.09,635.04 v2@-394.09,572.44 ; v2(-654.33,504.33) v2(-400,504.33) ; v2(-394.09,570.47) v2@-394.09,572.44 ; v2@-392.13,572.44 v2@-394.09,572.44 ; v2(-162.99,639.76) -41.53,761.23 650.58,761.23 1164.17,247.64 v2(1533.86,247.64) ; -1034.25,47.24 -1035.43,48.43 -1035.43,347.64 -1038.19,350.39 -1038.19,481.89 -1015.75,504.33 C36.1@-1015.75,555.12 ; -1034.25,47.24 -956.69,47.24 -955.51,48.43
pads on no net: BAT1.3 BAT2.3 BAT3.3 D4.2 D5.2 U1.44 U8.4 U10.10 U10.11

## Keep-outs
Keep-Out Layer:
  pour cut-out: 1839.35,897.96 1951.96,897.96 2102.48,897.96 2084.76,731.21 2084.76,621.65 1975.2,621.65 1845.67,621.65
  pour cut-out: -731.5,-1879.53 -937.15,-1861.81 -757.48,-1573.19 -75.17,-1958.76 -16.14,-2297.24 -44.61,-2308.54
  lines w6: -1968.65,-1159.24 -1968.65,-629.92 -1795.42,-629.92 -1795.42,-59.05 -1791.48,-59.05 ccw(c-1791.48,-19.68) -1752.11,-19.68 -1752.11,19.69 ccw(c-1791.48,19.69) -1791.48,59.06 -1795.42,59.06 -1795.42,629.92 -1968.65,629.92 -1968.65,1159.25 -1036.86,1697.22 -1007.33,1646.07 ccw(c-973.23,1665.76) -953.55,1631.66 -936.5,1641.51 ccw(c-956.19,1675.6) -922.09,1695.29 -951.62,1746.43 -19.83,2284.4 438.58,2019.74 351.97,1869.72 846.35,1584.28 844.38,1580.87 ccw(c878.48,1561.19) 858.79,1527.09 892.89,1507.41 ccw(c912.57,1541.5) 946.67,1521.82 948.64,1525.23 1443.02,1239.8 1529.64,1389.82 1988.05,1125.15 1988.05,-1125.15 1529.64,-1389.81 1443.02,-1239.79 948.64,-1525.22 946.67,-1521.82 ccw(c912.57,-1541.5) 892.89,-1507.4 858.79,-1527.09 ccw(c878.48,-1561.19) 844.38,-1580.87 846.35,-1584.28 351.97,-1869.71 438.58,-2019.73 -19.83,-2284.4 -1968.65,-1159.24
  lines w47.24: -1969.29,-1159.25 -1969.29,-629.92 -1796.06,-629.92 -1796.06,-59.06 -1792.13,-59.06 -1783.37,-58.07 -1775.04,-55.16 -1767.58,-50.47 -1761.35,-44.23 -1756.65,-36.77 -1753.74,-28.45 -1752.76,-19.68 -1752.76,19.68 -1753.74,28.45 -1756.65,36.77 -1761.35,44.23 -1767.58,50.47 -1775.04,55.16 -1783.37,58.07 -1792.13,59.06 -1794.88,59.06 -1794.88,629.92 -1969.29,629.92 -1969.29,1159.25 -1037.5,1697.22 -1007.97,1646.07 -1002.74,1638.98 -996.06,1633.23 -988.26,1629.11 -979.75,1626.83 -970.94,1626.5 -962.27,1628.14 -954.19,1631.66 -937.15,1641.5 -930.49,1646.34 -924.98,1652.46 -920.86,1659.59 -918.32,1667.41 -917.46,1675.6 -918.8,1685.79 -922.74,1695.29 -952.26,1746.43 -20.47,2284.4 437.94,2019.74 351.32,1869.71 845.71,1584.28 843.74,1580.87 840.21,1572.79 838.57,1564.13 838.9,1555.32 841.19,1546.8 845.31,1539.01 851.06,1532.33 858.15,1527.09 892.24,1507.41 900.33,1503.88 908.99,1502.24 917.8,1502.57 926.31,1504.85 934.11,1508.97 940.79,1514.72 946.03,1521.82 947.99,1525.23 1442.38,1239.79 1528.99,1389.81 1987.4,1125.15 1987.4,-1125.15 1528.99,-1389.81 1442.38,-1239.79 947.99,-1525.23 946.03,-1521.82 940.79,-1514.72 934.11,-1508.97 926.31,-1504.85 917.8,-1502.57 908.99,-1502.24 900.33,-1503.88 892.24,-1507.41 858.15,-1527.09 851.06,-1532.33 845.31,-1539.01 841.19,-1546.8 838.9,-1555.32 838.57,-1564.13 840.21,-1572.79 843.74,-1580.87 843.98,-1581.29 349.59,-1866.72 437.94,-2019.74 -20.47,-2284.4 -1969.29,-1159.25

## Silkscreen, mask and mechanical layers (free items; w line width, h text height)
Top Overlay:
  lines w6: -1007.33,1646.07 ccw(c-973.23,1665.76) -953.55,1631.66 ; -1007.33,1646.07 -1007.33,1646.07 ; -1007.33,1646.07 -1036.86,1697.22 -1968.65,1159.25 -1968.65,629.92 -1795.42,629.92 -1795.42,59.06 -1791.48,59.06 cw(c-1791.48,19.69) -1752.11,19.69 -1752.11,-19.68 cw(c-1791.48,-19.68) -1791.48,-59.05 -1795.42,-59.05 -1795.42,-629.92 -1968.65,-629.92 -1968.65,-1159.24 -19.83,-2284.4 438.58,-2019.73 351.97,-1869.71 846.35,-1584.28 844.38,-1580.87 ; -953.55,1631.66 -936.5,1641.51 ccw(c-956.19,1675.6) -922.09,1695.29 -951.62,1746.43 -19.83,2284.4 438.58,2019.74 351.97,1869.72 846.35,1584.28 844.38,1580.87 ; -953.55,1631.66 -953.55,1631.66 ; 844.38,-1580.87 cw(c878.48,-1561.19) 858.79,-1527.09 ; 844.38,-1580.87 844.38,-1580.87 ; 844.38,1580.87 ccw(c878.48,1561.19) 858.79,1527.09 ; 844.38,1580.87 844.38,1580.87 ; 858.79,-1527.09 858.79,-1527.09 ; 858.79,-1527.09 892.89,-1507.4 cw(c912.57,-1541.5) 946.67,-1521.82 ; 858.79,1527.09 892.89,1507.41 ; 858.79,1527.09 858.79,1527.09 ; 892.89,1507.41 ccw(c912.57,1541.5) 946.67,1521.82 948.64,1525.23 1443.02,1239.8 1529.64,1389.82 1988.05,1125.15 1988.05,-1125.15 1529.64,-1389.81 1443.02,-1239.79 948.64,-1525.22 946.67,-1521.82 ; 892.89,1507.41 892.89,1507.41 ; 946.67,-1521.82 946.67,-1521.82
Mechanical 1:
  circle w1: c-134.91,-1331.85 r78.74
  circle w1: c-1087.14,782.07 r78.74
  circle w1: c1219.68,549.77 r78.74
  circle w1: c-134.91,-1331.85 r177.16
  circle w1: c-1087.14,782.07 r177.16
  circle w1: c1219.68,549.77 r177.16
Mechanical 4:
  drawing of 5990 lines, arcs and shapes, not listed
Mechanical 5:
  circle w2: c0,0 r1476.38
  circle w2: c155.41,2001.46 r39.37
  circle w2: c-1811.02,-866.14 r39.37
  circle w2: c-1811.02,866.14 r39.37
  circle w2: c155.41,-2001.46 r39.37
  circle w2: c1655.61,-1135.32 r39.37
  circle w2: c1655.61,1135.32 r39.37
  lines w2: -39.37,340.25 ccw(c0,0) 39.37,340.25 ; -1968.5,-1159.25 -19.68,-2284.4 438.72,-2019.74 352.11,-1869.71 846.49,-1584.28 844.53,-1580.87 cw(c878.62,-1561.19) 858.94,-1527.09 893.03,-1507.41 cw(c912.72,-1541.5) 946.81,-1521.82 948.78,-1525.23 1443.17,-1239.79 1529.78,-1389.81 1988.19,-1125.15 1988.19,1125.15 1529.78,1389.81 1443.17,1239.79 948.78,1525.23 946.81,1521.82 cw(c912.72,1541.5) 893.03,1507.41 858.94,1527.09 cw(c878.62,1561.19) 844.53,1580.87 846.49,1584.28 352.11,1869.71 438.72,2019.73 -19.68,2284.4 -951.48,1746.43 -921.95,1695.29 cw(c-956.04,1675.6) -936.36,1641.5 -953.41,1631.66 cw(c-973.09,1665.76) -1007.19,1646.07 -1036.71,1697.22 -1968.5,1159.25 -1968.5,629.92 -1795.28,629.92 -1795.28,59.06 -1791.34,59.06 cw(c-1791.34,19.68) -1751.97,19.68 -1751.97,-19.69 cw(c-1791.34,-19.69) -1791.34,-59.06 -1795.28,-59.06 -1795.28,-629.92 -1968.5,-629.92 -1968.5,-1159.25
Mechanical 14:
  circle w0.04: c0,0 r1102.36
  circle w0.04: c0,0 r1590.56